# Altium PCB PCB1.PcbDoc
Units mil, origin at the board's own origin, x right, y up, seen from the top; angles counter-clockwise.
Board outline 5891.16 x 3558 mil, 2 copper layers (Top Layer, Bottom Layer); 128 components, 15 nets, 332 pads, 0 vias.
Unrouted connection lines stored in the file: 4.
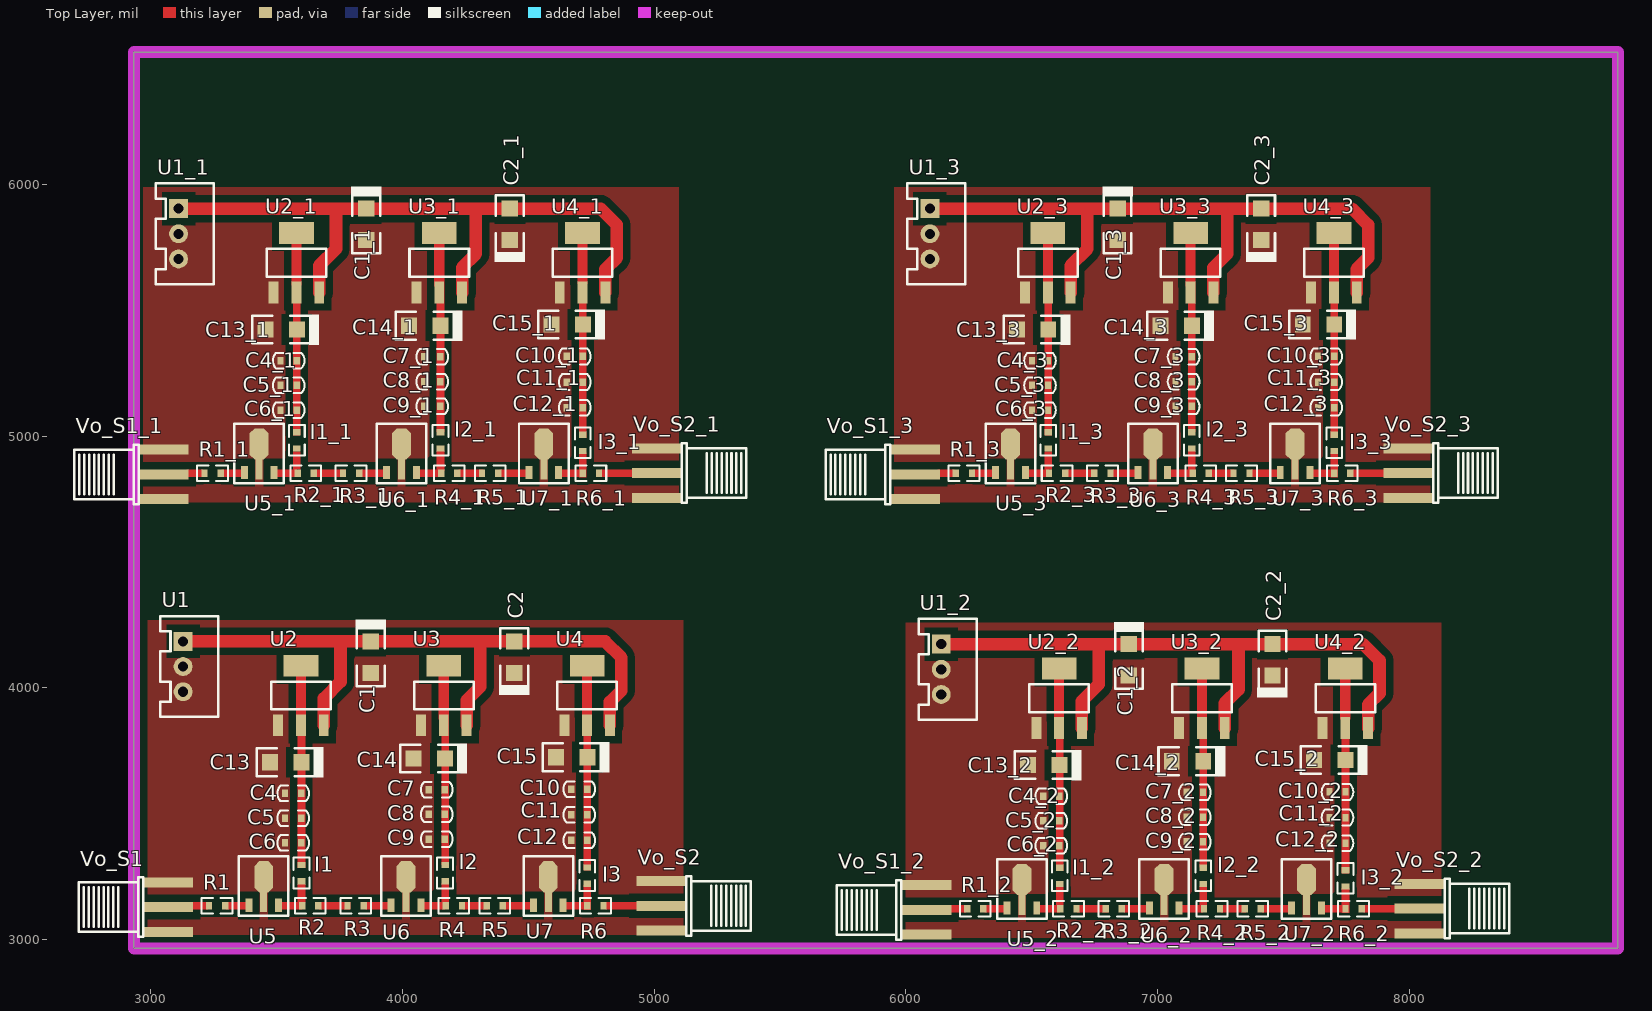
[diagram p0: Top Layer view]
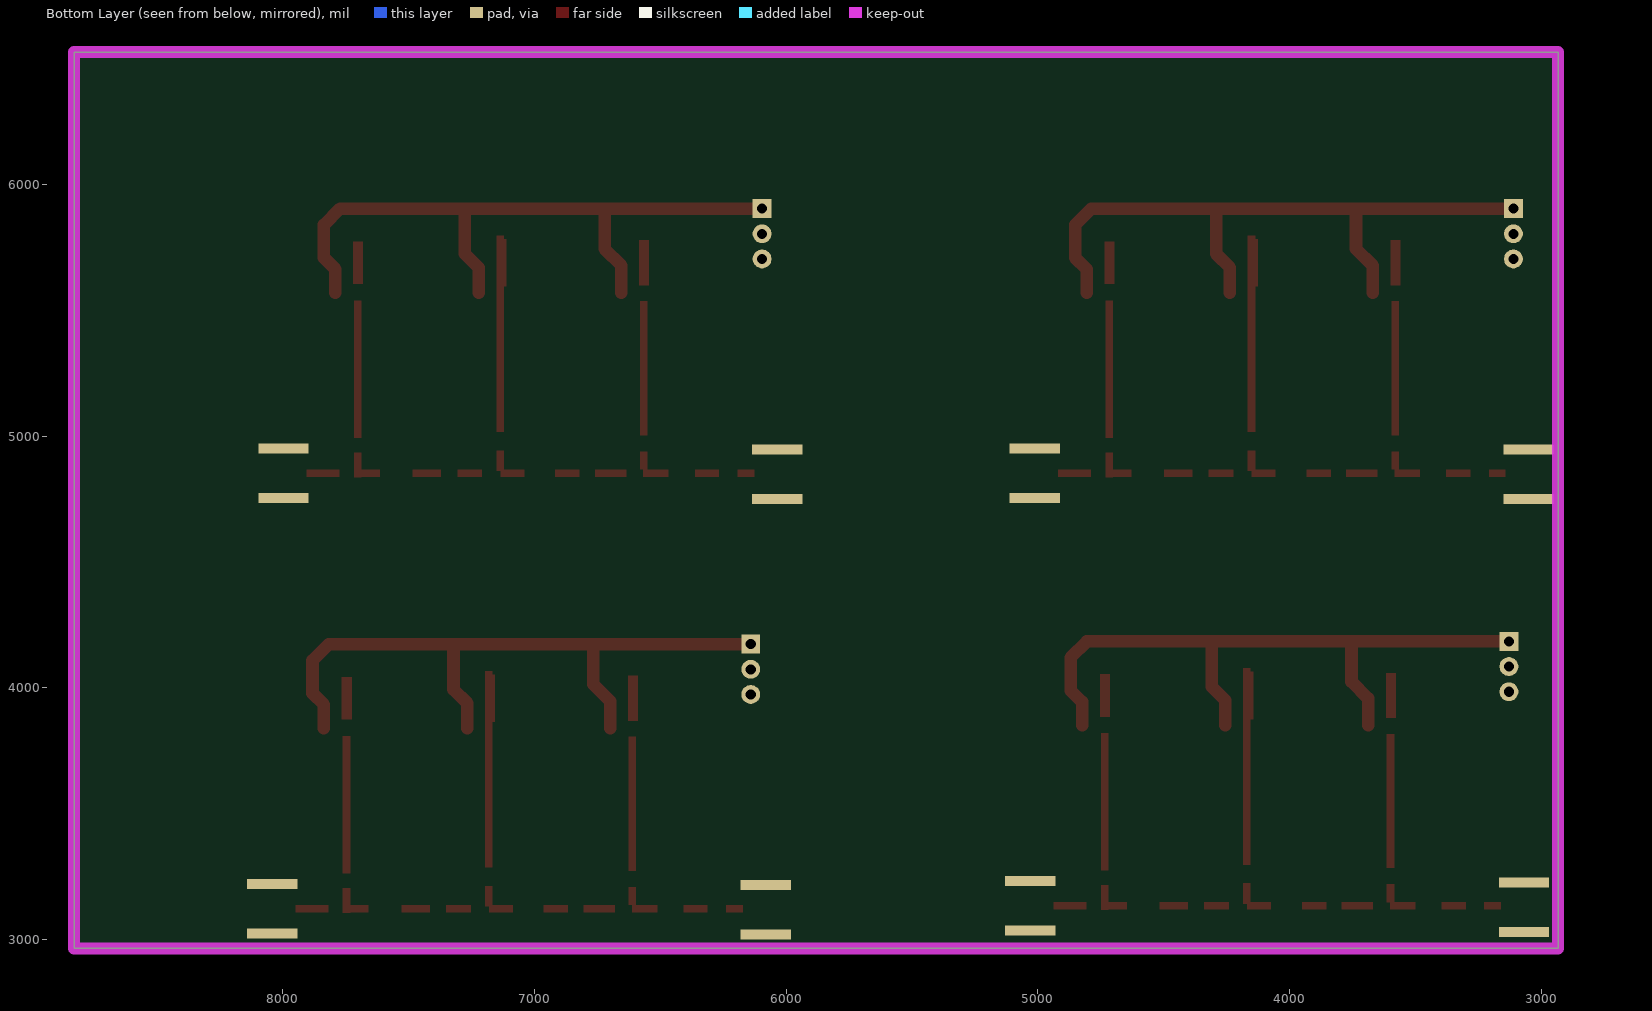
[diagram p1: Bottom Layer view, seen from below]

## Layer stack, top to bottom
Top Solder: solder mask 0.4, Solder Resist, Dk 3.5
Top Layer: signal copper 1.4
Dielectric 1: dielectric 12.6, FR-4, Dk 4.8
Bottom Layer: signal copper 1.4
Bottom Solder: solder mask 0.4, Solder Resist, Dk 3.5

## Board outline
2934.84,2966 2934.84,6524 8826,6524 8826,2966

## Design rules (kind name [scope] priority, off if disabled: settings)
Clearance [All] p1: gap=10 except(30: Arc-Poly Track-Poly SMDPad-Poly THPad-Poly Via-Poly Fill-Poly Poly-Poly)
PlaneConnect [All] p1: planeconnectstyle=Direct reliefexpansion=20 reliefentries=4 reliefconductorwidth=10 reliefairgap=10
PolygonConnect [All] p1: connectstyle=Direct reliefconductorwidth=10 reliefentries=4 polygonreliefangle="90 Angle" airgapwidth=10
RoutingVias [All] p1: holewidth=28 width=50 viastyle="Through Hole" minholewidth=28 minwidth=50 maxholewidth=28 maxwidth=50
SolderMaskExpansion [All] p1: expansion=4
Width [All] p1: maxlimit=100 minlimit=10 preferedwidth=10
29 further rules are at their usual default settings.

## Components (designator, comment, footprint, x,y, rotation, side; value= is the part's Value field where it differs from the comment)
C1 "Cap" 3216C-TYPE_A 3875,4185 r90 top
C1_1 "Cap" 3216C-TYPE_A 3857,5903 r90 top (schematic designator C1)
C1_2 "Cap" 3216C-TYPE_A 6885,4174 r90 top (schematic designator C1)
C1_3 "Cap" 3216C-TYPE_A 6840,5903 r90 top (schematic designator C1)
C2 "0.1uf" 3216C-TYPE_A 4445,4060 r270 top
C2_1 "0.1uf" 3216C-TYPE_A 4427,5778 r270 top (schematic designator C2)
C2_2 "0.1uf" 3216C-TYPE_A 7455,4049 r270 top (schematic designator C2)
C2_3 "0.1uf" 3216C-TYPE_A 7410,5778 r270 top (schematic designator C2)
C4 "0.1uf" 0603C 3535,3581.33 r0 top
C4_1 "0.1uf" 0603C 3517,5299.33 r0 top (schematic designator C4)
C4_2 "0.1uf" 0603C 6545,3570.33 r0 top (schematic designator C4)
C4_3 "0.1uf" 0603C 6500,5299.33 r0 top (schematic designator C4)
C5 "0.1uf" 0603C 3535,3483.17 r0 top
C5_1 "0.1uf" 0603C 3517,5201.17 r0 top (schematic designator C5)
C5_2 "0.1uf" 0603C 6545,3472.17 r0 top (schematic designator C5)
C5_3 "0.1uf" 0603C 6500,5201.17 r0 top (schematic designator C5)
C6 "0.1uf" 0603C 3535,3385 r0 top
C6_1 "0.1uf" 0603C 3517,5103 r0 top (schematic designator C6)
C6_2 "0.1uf" 0603C 6545,3374 r0 top (schematic designator C6)
C6_3 "0.1uf" 0603C 6500,5103 r0 top (schematic designator C6)
C7 "0.1uf" 0603C 4105,3596.33 r0 top
C7_1 "0.1uf" 0603C 4087,5314.33 r0 top (schematic designator C7)
C7_2 "0.1uf" 0603C 7115,3585.33 r0 top (schematic designator C7)
C7_3 "0.1uf" 0603C 7070,5314.33 r0 top (schematic designator C7)
C8 "0.1uf" 0603C 4105,3498.17 r0 top
C8_1 "0.1uf" 0603C 4087,5216.17 r0 top (schematic designator C8)
C8_2 "0.1uf" 0603C 7115,3487.17 r0 top (schematic designator C8)
C8_3 "0.1uf" 0603C 7070,5216.17 r0 top (schematic designator C8)
C9 "0.1uf" 0603C 4105,3400 r0 top
C9_1 "0.1uf" 0603C 4087,5118 r0 top (schematic designator C9)
C9_2 "0.1uf" 0603C 7115,3389 r0 top (schematic designator C9)
C9_3 "0.1uf" 0603C 7070,5118 r0 top (schematic designator C9)
C10 "0.1uf" 0603C 4671,3598 r0 top
C10_1 "0.1uf" 0603C 4653,5316 r0 top (schematic designator C10)
C10_2 "0.1uf" 0603C 7681,3587 r0 top (schematic designator C10)
C10_3 "0.1uf" 0603C 7636,5316 r0 top (schematic designator C10)
C11 "0.1uf" 0603C 4671,3496.5 r0 top
C11_1 "0.1uf" 0603C 4653,5214.5 r0 top (schematic designator C11)
C11_2 "0.1uf" 0603C 7681,3485.5 r0 top (schematic designator C11)
C11_3 "0.1uf" 0603C 7636,5214.5 r0 top (schematic designator C11)
C12 "0.1uf" 0603C 4671,3395 r0 top
C12_1 "0.1uf" 0603C 4653,5113 r0 top (schematic designator C12)
C12_2 "0.1uf" 0603C 7681,3384 r0 top (schematic designator C12)
C12_3 "0.1uf" 0603C 7636,5113 r0 top (schematic designator C12)
C13 "0.1uf" 3216C-TYPE_A 3600,3705 r0 top
C13_1 "0.1uf" 3216C-TYPE_A 3582,5423 r0 top (schematic designator C13)
C13_2 "0.1uf" 3216C-TYPE_A 6610,3694 r0 top (schematic designator C13)
C13_3 "0.1uf" 3216C-TYPE_A 6565,5423 r0 top (schematic designator C13)
C14 "0.1uf" 3216C-TYPE_A 4170,3720 r0 top
C14_1 "0.1uf" 3216C-TYPE_A 4152,5438 r0 top (schematic designator C14)
C14_2 "0.1uf" 3216C-TYPE_A 7180,3709 r0 top (schematic designator C14)
C14_3 "0.1uf" 3216C-TYPE_A 7135,5438 r0 top (schematic designator C14)
C15 "0.1uf" 3216C-TYPE_A 4735,3725 r0 top
C15_1 "0.1uf" 3216C-TYPE_A 4717,5443 r0 top (schematic designator C15)
C15_2 "0.1uf" 3216C-TYPE_A 7745,3714 r0 top (schematic designator C15)
C15_3 "0.1uf" 3216C-TYPE_A 7700,5443 r0 top (schematic designator C15)
I1 "Inductor" 0603R 3600,3265 r90 top
I1_1 "Inductor" 0603R 3582,4983 r90 top (schematic designator I1)
I1_2 "Inductor" 0603R 6610,3254 r90 top (schematic designator I1)
I1_3 "Inductor" 0603R 6565,4983 r90 top (schematic designator I1)
I2 "Inductor" 0603R 4170,3265 r90 top
I2_1 "Inductor" 0603R 4152,4983 r90 top (schematic designator I2)
I2_2 "Inductor" 0603R 7180,3254 r90 top (schematic designator I2)
I2_3 "Inductor" 0603R 7135,4983 r90 top (schematic designator I2)
I3 "Inductor" 0603R 4735,3255 r90 top
I3_1 "Inductor" 0603R 4717,4973 r90 top (schematic designator I3)
I3_2 "Inductor" 0603R 7745,3244 r90 top (schematic designator I3)
I3_3 "Inductor" 0603R 7700,4973 r90 top (schematic designator I3)
R1 "0" 0603R 3265,3135 r0 top
R1_1 "0" 0603R 3247,4853 r0 top (schematic designator R1)
R1_2 "0" 0603R 6275,3124 r0 top (schematic designator R1)
R1_3 "0" 0603R 6230,4853 r0 top (schematic designator R1)
R2 "0" 0603R 3635,3135 r0 top
R2_1 "0" 0603R 3617,4853 r0 top (schematic designator R2)
R2_2 "0" 0603R 6645,3124 r0 top (schematic designator R2)
R2_3 "0" 0603R 6600,4853 r0 top (schematic designator R2)
R3 "0" 0603R 3815,3135 r0 top
R3_1 "0" 0603R 3797,4853 r0 top (schematic designator R3)
R3_2 "0" 0603R 6825,3124 r0 top (schematic designator R3)
R3_3 "0" 0603R 6780,4853 r0 top (schematic designator R3)
R4 "0" 0603R 4205,3135 r0 top
R4_1 "0" 0603R 4187,4853 r0 top (schematic designator R4)
R4_2 "0" 0603R 7215,3124 r0 top (schematic designator R4)
R4_3 "0" 0603R 7170,4853 r0 top (schematic designator R4)
R5 "0" 0603R 4367,3135 r0 top
R5_1 "0" 0603R 4349,4853 r0 top (schematic designator R5)
R5_2 "0" 0603R 7377,3124 r0 top (schematic designator R5)
R5_3 "0" 0603R 7332,4853 r0 top (schematic designator R5)
R6 "0" 0603R 4767,3135 r0 top
R6_1 "0" 0603R 4749,4853 r0 top (schematic designator R6)
R6_2 "0" 0603R 7777,3124 r0 top (schematic designator R6)
R6_3 "0" 0603R 7732,4853 r0 top (schematic designator R6)
U1 "XH2.54-3p" XH2.54-3p 3130,4185 r270 top
U1_1 "XH2.54-3p" XH2.54-3p 3112,5903 r270 top (schematic designator U1)
U1_2 "XH2.54-3p" XH2.54-3p 6140,4174 r270 top (schematic designator U1)
U1_3 "XH2.54-3p" XH2.54-3p 6095,5903 r270 top (schematic designator U1)
U2 "AMS1117-3.0V" SOT-223 3598,3970.11 r270 top
U2_1 "AMS1117-3.0V" SOT-223 3580,5688.11 r270 top (schematic designator U2)
U2_2 "AMS1117-3.0V" SOT-223 6608,3959.11 r270 top (schematic designator U2)
U2_3 "AMS1117-3.0V" SOT-223 6563,5688.11 r270 top (schematic designator U2)
U3 "AMS1117-3.0V" SOT-223 4165,3970 r270 top
U3_1 "AMS1117-3.0V" SOT-223 4147,5688 r270 top (schematic designator U3)
U3_2 "AMS1117-3.0V" SOT-223 7175,3959 r270 top (schematic designator U3)
U3_3 "AMS1117-3.0V" SOT-223 7130,5688 r270 top (schematic designator U3)
U4 "AMS1117-3.0V" SOT-223 4734,3970.11 r270 top
U4_1 "AMS1117-3.0V" SOT-223 4716,5688.11 r270 top (schematic designator U4)
U4_2 "AMS1117-3.0V" SOT-223 7744,3959.11 r270 top (schematic designator U4)
U4_3 "AMS1117-3.0V" SOT-223 7699,5688.11 r270 top (schematic designator U4)
U5 "SBB5089" SOT-89 3350.95,3337.2 r0 top
U5_1 "SBB5089" SOT-89 3332.95,5055.2 r0 top (schematic designator U5)
U5_2 "SBB5089" SOT-89 6360.94,3326.2 r0 top (schematic designator U5)
U5_3 "SBB5089" SOT-89 6315.94,5055.2 r0 top (schematic designator U5)
U6 "SBB5089" SOT-89 3915.95,3337.2 r0 top
U6_1 "SBB5089" SOT-89 3897.95,5055.2 r0 top (schematic designator U6)
U6_2 "SBB5089" SOT-89 6925.94,3326.2 r0 top (schematic designator U6)
U6_3 "SBB5089" SOT-89 6880.94,5055.2 r0 top (schematic designator U6)
U7 "SBB5089" SOT-89 4480.94,3337.2 r0 top
U7_1 "SBB5089" SOT-89 4462.94,5055.2 r0 top (schematic designator U7)
U7_2 "SBB5089" SOT-89 7490.94,3326.2 r0 top (schematic designator U7)
U7_3 "SBB5089" SOT-89 7445.94,5055.2 r0 top (schematic designator U7)
Vo_S1 "差分输出" "SMA Angle" 3070,3031.57 r0 top
Vo_S1_1 "差分输出" "SMA Angle" 3052,4749.57 r0 top (schematic designator Vo_S1)
Vo_S1_2 "差分输出" "SMA Angle" 6080,3020.57 r0 top (schematic designator Vo_S1)
Vo_S1_3 "差分输出" "SMA Angle" 6035,4749.57 r0 top (schematic designator Vo_S1)
Vo_S2 "差分输出" "SMA Angle" 5030,3233.43 r180 top
Vo_S2_1 "差分输出" "SMA Angle" 5012,4951.43 r180 top (schematic designator Vo_S2)
Vo_S2_2 "差分输出" "SMA Angle" 8040,3222.43 r180 top (schematic designator Vo_S2)
Vo_S2_3 "差分输出" "SMA Angle" 7995,4951.43 r180 top (schematic designator Vo_S2)

## Footprints (in the part's own frame and the unit in brackets; to place one, negate y for a bottom-side part, rotate by r counter-clockwise, add the part's x,y. Pads: shape width x height; smd on the part's side, far side on the other; paste and mask are expansions set on the pad)
0603C [mil]
  rect 25x30 smd: 1(0,0) 2(64,0)
  silkscreen extent -31,-31 95,31
0603R [mil]
  rect 25x30 smd: 1(-32,0) 2(32,0)
  silkscreen extent -61,-31 61,31
3216C-TYPE_A [mm]
  rect 1.6x1.65 smd: 1(0,0) 2(-3.175,0)
  silkscreen extent -4.51,-1.54 2.22,1.52
"SMA Angle" [mil]
  rect 200x40 smd: 0(0,98.43) 1(0,0) 1(0,196.85)
  rect 200x40 smd far side: 1(0,0) 1(0,196.85)
  silkscreen extent -354,-20 -98,217
SOT-89 [mm]
  rect 0.7x1.35 smd: 1(1.016,-5.08) 3(4.016,-5.08)
  rect 0.7x1.99 smd: 2(2.516,-4.785)
  oct 1.9x3.15 smd: 2(2.516,-2.215)
  silkscreen extent 0.02,-6.15 5.02,-0.15
SOT-223 [mm]
  rect 2.2x1 smd: 1(3,-2.3) 2(3,0) 3(3,2.3)
  rect 2.2x3.5 smd: 2(-3,0)
  silkscreen extent -1.4,-3 1.4,3, body extent -3.49,-3.24 3.49,3.24, height 1.64
XH2.54-3p [mil]
  rect 75x75 hole 40: 1(0,0)
  round 75 hole 40: 2(100,0) 3(200,0)
  silkscreen extent -100,-90 300,140

## Part data
C1 C1_1 C1_2 C1_3: library part "Tantalium Cap"
C2 C2_1 C2_2 C2_3 C4 C4_1 C4_2 C4_3 C5 C5_1 C5_2 C5_3 C6 C6_1 C6_2 C6_3 C7 C7_1 C7_2 C7_3 C8 C8_1 C8_2 C8_3 C9 C9_1 C9_2 C9_3 C10 C10_1 C10_2 C10_3 C11 C11_1 C11_2 C11_3 C12 C12_1 C12_2 C12_3 C13 C13_1 C13_2 C13_3 C14 C14_1 C14_2 C14_3 C15 C15_1 C15_2 C15_3: library part Cap
R1 R1_1 R1_2 R1_3 R2 R2_1 R2_2 R2_3 R3 R3_1 R3_2 R3_3 R4 R4_1 R4_2 R4_3 R5 R5_1 R5_2 R5_3 R6 R6_1 R6_2 R6_3: library part Res
Vo_S1 Vo_S1_1 Vo_S1_2 Vo_S1_3 Vo_S2 Vo_S2_1 Vo_S2_2 Vo_S2_3: library part SMA

## Nets (pads, with @x,y where several pads share a name; then routed paths per layer and width w, separated by ;. In a path a pad name is that pad's centre, name@x,y a point inside that pad or via, vN(x,y) a via of type N, cw(c..) or ccw(c..) an arc to the next point about the centre after c; other vN are vias at no path point)
GND: C1.2 C2.1 C4.1 C5.1 C6.1 C7.1 C8.1 C9.1 C10.1 C11.1 C12.1 C13.2 C14.2 C15.2 U1.2 U1.3 U2.1 U3.1 U4.1 U5.2 U6.2 U7.2 Vo_S1.1 Vo_S2.1
NetC1_1: C1.1 C2.2 U1.1 U2.3 U3.3 U4.3 | length 2769.9
  Top Layer w50: U1.1 3755,4185 ; U2.3 3688.55,3958.55 3755,4025 3755,4185 ; U3.3 4255.55,3950.55 4310,4005 4310,4185 ; U4.3 4824.55,3944.55 4870,3990 4870,4120 4805,4185 C2.2 4310,4185 ; 3755,4185 C1.1 4310,4185
NetC4_2: C4.2 C5.2 C6.2 C13.1 I1.2 U2.2
NetC7_2: C7.2 C8.2 C9.2 C14.1 I2.2 U3.2
NetC10_2: C10.2 C11.2 C12.2 C15.1 I3.2 U4.2
NetI1_1: I1.1 R2.1 U5.3
NetI2_1: I2.1 R4.1 U6.3
NetI3_1: I3.1 R6.1 U7.3
NetR1_1: R1.1 Vo_S1.0
NetR1_2: R1.2 U5.1
NetR2_2: R2.2 R3.1
NetR3_2: R3.2 U6.1
NetR4_2: R4.2 R5.1
NetR5_2: R5.2 U7.1
NetR6_2: R6.2 Vo_S2.0
pads on no net: C1_1.1 C1_1.2 C1_2.1 C1_2.2 C1_3.1 C1_3.2 C2_1.1 C2_1.2 C2_2.1 C2_2.2 C2_3.1 C2_3.2 C4_1.1 C4_1.2 C4_2.1 C4_2.2 C4_3.1 C4_3.2 C5_1.1 C5_1.2 C5_2.1 C5_2.2 C5_3.1 C5_3.2 C6_1.1 C6_1.2 C6_2.1 C6_2.2 C6_3.1 C6_3.2 C7_1.1 C7_1.2 C7_2.1 C7_2.2 C7_3.1 C7_3.2 C8_1.1 C8_1.2 C8_2.1 C8_2.2 C8_3.1 C8_3.2 C9_1.1 C9_1.2 C9_2.1 C9_2.2 C9_3.1 C9_3.2 C10_1.1 C10_1.2 C10_2.1 C10_2.2 C10_3.1 C10_3.2 C11_1.1 C11_1.2 C11_2.1 C11_2.2 C11_3.1 C11_3.2 C12_1.1 C12_1.2 C12_2.1 C12_2.2 C12_3.1 C12_3.2 C13_1.1 C13_1.2 C13_2.1 C13_2.2 C13_3.1 C13_3.2 C14_1.1 C14_1.2 C14_2.1 C14_2.2 C14_3.1 C14_3.2 C15_1.1 C15_1.2 C15_2.1 C15_2.2 C15_3.1 C15_3.2 I1_1.1 I1_1.2 I1_2.1 I1_2.2 I1_3.1 I1_3.2 I2_1.1 I2_1.2 I2_2.1 I2_2.2 I2_3.1 I2_3.2 I3_1.1 I3_1.2 I3_2.1 I3_2.2 I3_3.1 I3_3.2 R1_1.1 R1_1.2 R1_2.1 R1_2.2 R1_3.1 R1_3.2 R2_1.1 R2_1.2 R2_2.1 R2_2.2 R2_3.1 R2_3.2 R3_1.1 R3_1.2 R3_2.1 R3_2.2 R3_3.1 R3_3.2 R4_1.1 R4_1.2 R4_2.1 R4_2.2 R4_3.1 R4_3.2 R5_1.1 R5_1.2 R5_2.1 R5_2.2 R5_3.1 R5_3.2 R6_1.1 R6_1.2 R6_2.1 R6_2.2 R6_3.1 R6_3.2 U1_1.1 U1_1.2 U1_1.3 U1_2.1 U1_2.2 U1_2.3 U1_3.1 U1_3.2 U1_3.3 U2_1.1 U2_1.2 U2_1.3 U2_2.1 U2_2.2 U2_2.3 U2_3.1 U2_3.2 U2_3.3 U3_1.1 U3_1.2 U3_1.3 U3_2.1 U3_2.2 U3_2.3 U3_3.1 U3_3.2 U3_3.3 U4_1.1 U4_1.2 U4_1.3 U4_2.1 U4_2.2 U4_2.3 U4_3.1 U4_3.2 U4_3.3 U5_1.1 U5_1.2 U5_1.3 U5_2.1 U5_2.2 U5_2.3 U5_3.1 U5_3.2 U5_3.3 U6_1.1 U6_1.2 U6_1.3 U6_2.1 U6_2.2 U6_2.3 U6_3.1 U6_3.2 U6_3.3 U7_1.1 U7_1.2 U7_1.3 U7_2.1 U7_2.2 U7_2.3 U7_3.1 U7_3.2 U7_3.3 Vo_S1_1.0 Vo_S1_1.1 Vo_S1_2.0 Vo_S1_2.1 Vo_S1_3.0 Vo_S1_3.1 Vo_S2_1.0 Vo_S2_1.1 Vo_S2_2.0 Vo_S2_2.1 Vo_S2_3.0 Vo_S2_3.1
copper on no net: | length 8309.8
  Top Layer w50: 3112,5903 3737,5903 ; 3670.55,5570 3670.55,5676.55 3737,5743 3737,5903 ; 4237.55,5569.89 4237.55,5668.55 4292,5723 4292,5903 ; 4806.55,5570 4806.55,5662.55 4852,5708 4852,5838 4787,5903 4427,5903 4292,5903 ; 6095,5903 6720,5903 ; 6140,4174 6765,4174 ; 6653.55,5570 6653.55,5676.55 6720,5743 6720,5903 ; 6698.55,3841 6698.55,3947.55 6765,4014 6765,4174 ; 7220.55,5569.89 7220.55,5668.55 7275,5723 7275,5903 ; 7265.55,3840.89 7265.55,3939.55 7320,3994 7320,4174 ; 7789.55,5570 7789.55,5662.55 7835,5708 7835,5838 7770,5903 7410,5903 7275,5903 ; 7834.55,3841 7834.55,3933.55 7880,3979 7880,4109 7815,4174 7455,4174 7320,4174 ; 3737,5903 3857,5903 4292,5903 ; 6720,5903 6840,5903 7275,5903 ; 6765,4174 6885,4174 7320,4174

## Polygon pours and split planes (outlines as drawn)
no net on Top Layer "Top Layer-No Net" (solid, pour order 6): 5899.84,4684 8135.03,4684 8135.03,6041 5899.84,6041
no net on Top Layer "Top Layer-No Net" (solid, pour order 4): 5944.84,2955 8180.03,2955 8180.03,4312 5944.84,4312
no net on Top Layer "Top Layer-No Net" (solid, pour order 2): 2916.84,4684 5152.03,4684 5152.03,6041 2916.84,6041
GND on Top Layer "Top Layer-No Net" (solid, pour order 0): 2934.84,2966 5170.03,2966 5170.03,4323 2934.84,4323

## Keep-outs
Keep-Out Layer:
  the board outline again, w47.24

## Other copper
Top Layer:
  rectangle: 7679,5603 7719,5773
  rectangle: 7110,5593 7150,5783
  rectangle: 6543,5598 6583,5778
  rectangle: 6550,5003 6580,5536
  rectangle: 7121,5103 7147,5535
  rectangle: 7685,4993 7715,5539
  rectangle: 7120,5016 7150,5797
  rectangle: 6466,4838 6567,4868
  rectangle: 6550,4867 6580,4939
  rectangle: 6266,4838 6362,4868
  rectangle: 6126,4838 6193,4868
  rectangle: 6634,4838 6759,4868
  rectangle: 6820,4838 6917,4868
  rectangle: 7039,4838 7134,4868
  rectangle: 7206,4838 7305,4868
  rectangle: 7369,4838 7482,4868
  rectangle: 7120,4861 7150,4943
  rectangle: 7612,4838 7697,4868
  rectangle: 7685,4836 7715,4935
  rectangle: 7772,4838 7903,4868
  rectangle: 7724,3874 7764,4044
  rectangle: 7155,3864 7195,4054
  rectangle: 6588,3869 6628,4049
  rectangle: 6595,3274 6625,3807
  rectangle: 7166,3374 7192,3806
  rectangle: 7730,3264 7760,3810
  rectangle: 7165,3287 7195,4068
  rectangle: 6511,3109 6612,3139
  rectangle: 6595,3138 6625,3210
  rectangle: 6311,3109 6407,3139
  rectangle: 6171,3109 6238,3139
  rectangle: 6679,3109 6804,3139
  rectangle: 6865,3109 6962,3139
  rectangle: 7084,3109 7179,3139
  rectangle: 7251,3109 7350,3139
  rectangle: 7414,3109 7527,3139
  rectangle: 7165,3132 7195,3214
  rectangle: 7657,3109 7742,3139
  rectangle: 7730,3107 7760,3206
  rectangle: 7817,3109 7948,3139
  rectangle: 4696,5603 4736,5773
  rectangle: 4127,5593 4167,5783
  rectangle: 3560,5598 3600,5778
  rectangle: 3567,5003 3597,5536
  rectangle: 4138,5103 4164,5535
  rectangle: 4702,4993 4732,5539
  rectangle: 4137,5016 4167,5797
  rectangle: 3483,4838 3584,4868
  rectangle: 3567,4867 3597,4939
  rectangle: 3283,4838 3379,4868
  rectangle: 3143,4838 3210,4868
  rectangle: 3651,4838 3776,4868
  rectangle: 3837,4838 3934,4868
  rectangle: 4056,4838 4151,4868
  rectangle: 4223,4838 4322,4868
  rectangle: 4386,4838 4499,4868
  rectangle: 4137,4861 4167,4943
  rectangle: 4629,4838 4714,4868
  rectangle: 4702,4836 4732,4935
  rectangle: 4789,4838 4920,4868
  rectangle net NetR6_2: 4807,3120 4938,3150
  rectangle net NetI3_1: 4720,3118 4750,3217
  rectangle net NetI3_1: 4647,3120 4732,3150
  rectangle net NetI2_1: 4155,3143 4185,3225
  rectangle net NetR5_2: 4404,3120 4517,3150
  rectangle net NetR4_2: 4241,3120 4340,3150
  rectangle net NetI2_1: 4074,3120 4169,3150
  rectangle net NetR3_2: 3855,3120 3952,3150
  rectangle net NetR2_2: 3669,3120 3794,3150
  rectangle net NetR1_1: 3161,3120 3228,3150
  rectangle net NetR1_2: 3301,3120 3397,3150
  rectangle net NetI1_1: 3585,3149 3615,3221
  rectangle net NetI1_1: 3501,3120 3602,3150
  rectangle net NetC7_2: 4155,3298 4185,4079
  rectangle net NetC10_2: 4720,3275 4750,3821
  rectangle net NetC7_2: 4156,3385 4182,3817
  rectangle net NetC4_2: 3585,3285 3615,3818
  rectangle net NetC4_2: 3578,3880 3618,4060
  rectangle net NetC7_2: 4145,3875 4185,4065
  rectangle net NetC10_2: 4714,3885 4754,4055